# EAGLE board AMR3350 (EAGLE 9.3.0), part 1 of 2
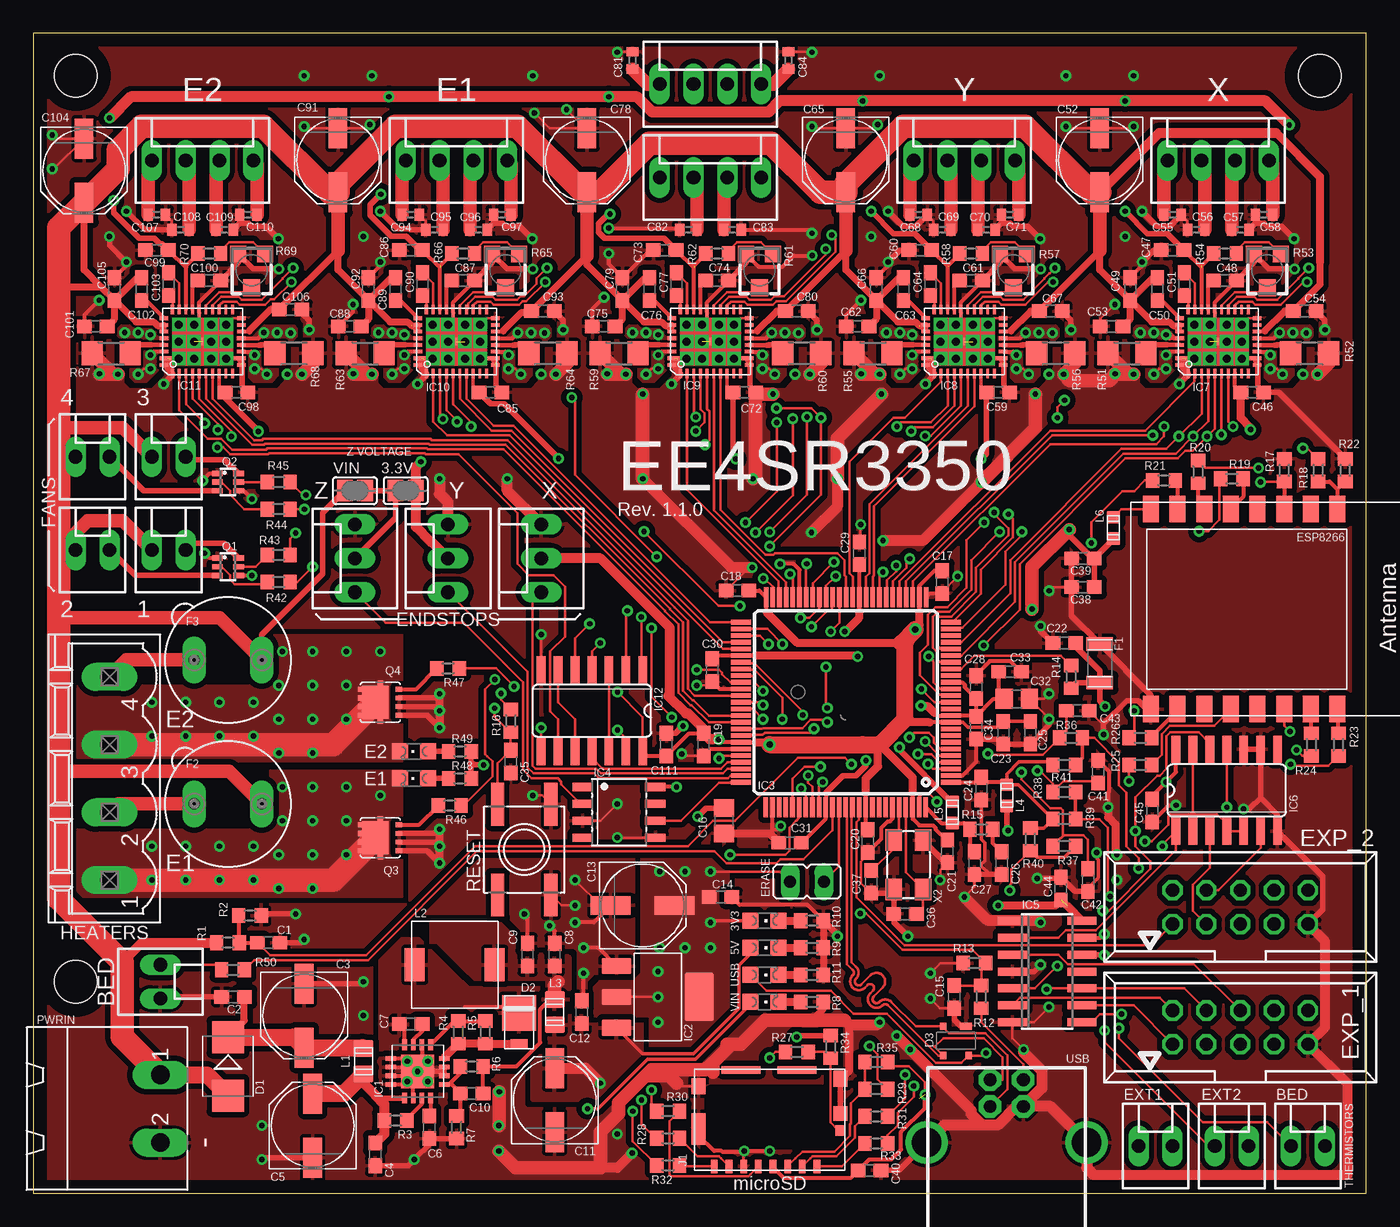
[diagram p0: board, top side]
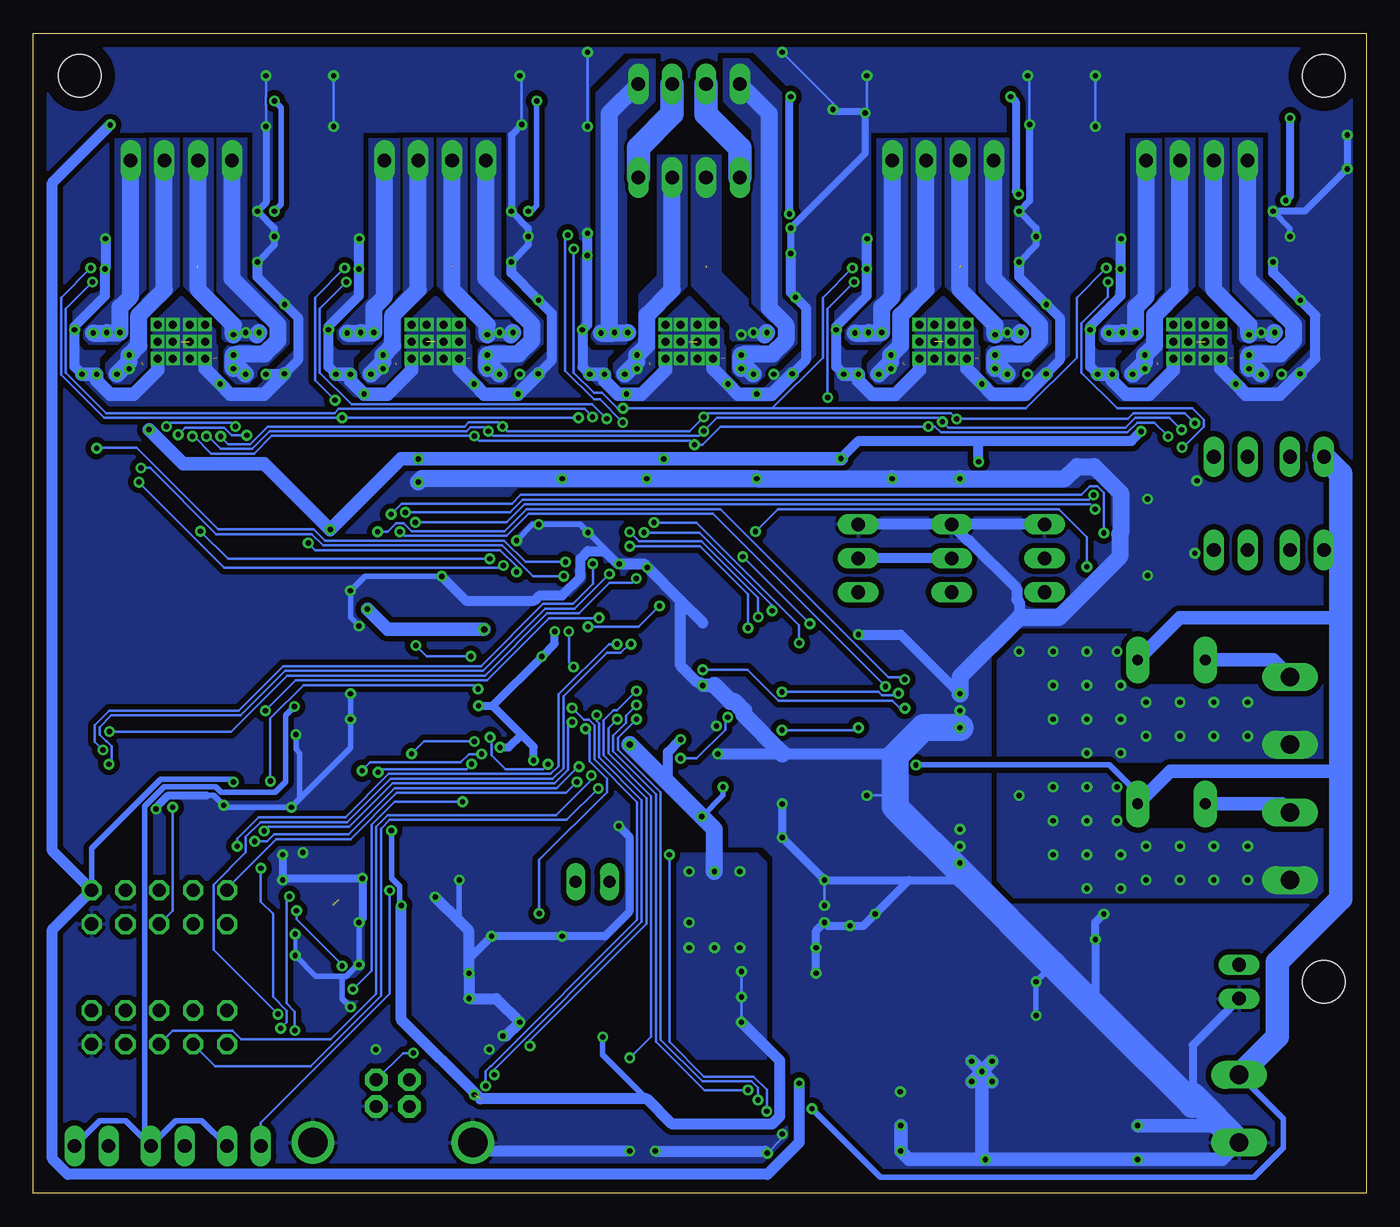
[diagram p1: board, bottom side, seen from below]

Size 100 x 87 mm. Coordinates in mm from the lower left corner, seen from the top.
Outline: 0,0 100,0 100,87 0,87 0,0
Copper layers (1*16): Top 0.035mm / dielectric 1.5mm / Bottom 0.035mm
Design rules "default *": minimum track width 6mil, minimum drill 0.4mm, track to track 6mil, track to pad 6mil, pad to pad 8mil, via to via 10mil, smd to smd 6mil, copper to edge 40mil, drill to drill 6mil, minimum pad ring 10mil, minimum via ring 8mil, stop-mask expansion 4mil, vias tented up to drill 16mil, thermal gap 10mil
Net classes: 3 usbvcc: width 0.102 mm, drill 0.1 mm, clearance 0.15 mm; 4 diff: width 0.203 mm
Holes 3.2 mm at 3.17,83.82 3.17,15.88 96.52,83.82
tKeepout: area 0.2,80.8 to 6.2,86.8; area 0.2,12.9 to 6.2,18.9; area 93.5,80.8 to 99.5,86.8

## Footprints (pad centres in the part's own frame; a part is rotated, then mirrored left to right if it is on the bottom)
CHIPLED_0805 = smd 1.2 x 1.2: A 0,-1.05; C 0,1.05
MOLEX-KK-254-2 = drill 1.02 long: 1 -1.27,0; 2 1.27,0
C0603 = smd 1.1 x 1: 1 -0.85,0; 2 0.85,0
PANASONIC_D = smd 3 x 1.4: + 2.4,0; - -2.4,0
C0805 = smd 1.3 x 1.5: 1 -0.95,0; 2 0.95,0
C0402 = smd 0.7 x 0.9: 1 -0.65,0; 2 0.65,0
SMB = smd 2.4 x 2.4: A 2.2,0; C -2.2,0
DO220AAL = smd 2.667 x 2.54: P$1 -0.7,0 | smd 0.762 x 1.27: P$2 1.65,0
SOT143B = smd 0.88 x 0.55: 1 -0.75,-1.1 | smd 0.48 x 0.55: 2 0.95,-1.1; 3 0.95,1.1; 4 -0.95,1.1
JP1 = drill 0.914 long: 1 0,-1.27; 2 0,1.27
ESP-12 = smd 2 x 1.2: 1 -7.5,4.5; 2 -7.5,2.5; 3 -7.5,0.5; 4 -7.5,-1.5; 5 -7.5,-3.5; 6 -7.5,-5.5; 7 -7.5,-7.5; 8 -7.5,-9.5; 9 7.5,-9.5; 10 7.5,-7.5; 11 7.5,-5.5; 12 7.5,-3.5; 13 7.5,-1.5; 14 7.5,0.5; 15 7.5,2.5; 16 7.5,4.5
057-010-1 = drill 1 octagon: 1 -5.08,-1.27; 2 -5.08,1.27; 3 -2.54,-1.27; 4 -2.54,1.27; 5 0,-1.27; 6 0,1.27; 7 2.54,-1.27; 8 2.54,1.27; 9 5.08,-1.27; 10 5.08,1.27
MC36207 = smd 1 x 2: 1 -1.45,0; 2 1.45,0
19560 = drill 0.813 pad 1.778 long: 1 -2.54,0; 2 2.54,0
QFN16-4X4 = smd 0.8 x 0.35: 1 -2,0.975; 2 -2,0.325; 3 -2,-0.325; 4 -2,-0.975; 9 2,-0.975; 10 2,-0.325; 11 2,0.325; 12 2,0.975 | smd 0.35 x 0.8: 5 -0.975,-2; 6 -0.325,-2; 7 0.325,-2; 8 0.975,-2; 13 0.975,2; 14 0.325,2; 15 -0.325,2; 16 -0.975,2 | smd 2.5 x 2.5: EXP 0,0
SOT223 = smd 2.235 x 1.219: 1 -3.099,2.311; 2 -3.099,0; 3 -3.099,-2.311 | smd 2.2 x 3.6: 4 3.099,0
LQFP100 = smd 1.5 x 0.35: 1 -7.875,6; 2 -7.875,5.5; 3 -7.875,5; 4 -7.875,4.5; 5 -7.875,4; 6 -7.875,3.5; 7 -7.875,3; 8 -7.875,2.5; 9 -7.875,2; 10 -7.875,1.5; 11 -7.875,1; 12 -7.875,0.5; 13 -7.875,0; 14 -7.875,-0.5; 15 -7.875,-1; 16 -7.875,-1.5; 17 -7.875,-2; 18 -7.875,-2.5; 19 -7.875,-3; 20 -7.875,-3.5; 21 -7.875,-4; 22 -7.875,-4.5; 23 -7.875,-5; 24 -7.875,-5.5; 25 -7.875,-6; 51 7.875,-6; 52 7.875,-5.5; 53 7.875,-5; 54 7.875,-4.5; 55 7.875,-4; 56 7.875,-3.5; 57 7.875,-3; 58 7.875,-2.5; 59 7.875,-2; 60 7.875,-1.5; 61 7.875,-1; 62 7.875,-0.5; 63 7.875,0; 64 7.875,0.5; 65 7.875,1; 66 7.875,1.5; 67 7.875,2; 68 7.875,2.5; 69 7.875,3; 70 7.875,3.5; 71 7.875,4; 72 7.875,4.5; 73 7.875,5; 74 7.875,5.5; 75 7.875,6 | smd 0.35 x 1.5: 26 -6.025,-7.875; 27 -5.525,-7.875; 28 -5.025,-7.875; 29 -4.525,-7.875; 30 -4.025,-7.875; 31 -3.525,-7.875; 32 -3.025,-7.875; 33 -2.525,-7.875; 34 -2.025,-7.875; 35 -1.525,-7.875; 36 -1.025,-7.875; 37 -0.525,-7.875; 38 -0.025,-7.875; 39 0.475,-7.875; 40 0.975,-7.875; 41 1.475,-7.875; 42 1.975,-7.875; 43 2.475,-7.875; 44 2.975,-7.875; 45 3.475,-7.875; 46 3.975,-7.875; 47 4.475,-7.875; 48 4.975,-7.875; 49 5.475,-7.875; 50 5.975,-7.875; 76 6,7.875; 77 5.5,7.875; 78 5,7.875; 79 4.5,7.875; 80 4,7.875; 81 3.5,7.875; 82 3,7.875; 83 2.5,7.875; 84 2,7.875; 85 1.5,7.875; 86 1,7.875; 87 0.5,7.875; 88 0,7.875; 89 -0.5,7.875; 90 -1,7.875; 91 -1.5,7.875; 92 -2,7.875; 93 -2.5,7.875; 94 -3,7.875; 95 -3.5,7.875; 96 -4,7.875; 97 -4.5,7.875; 98 -5,7.875; 99 -5.5,7.875; 100 -6,7.875
SOIC08-FAIRCHILD = smd 0.61 x 1.52: 1 -1.905,-2.723; 2 -0.635,-2.723; 3 0.635,-2.723; 4 1.905,-2.723; 5 1.905,2.723; 6 0.635,2.723; 7 -0.635,2.723; 8 -1.905,2.723
SO14 = smd 0.6 x 2.2: 1 -3.81,-2.6; 2 -2.54,-2.6; 3 -1.27,-2.6; 4 0,-2.6; 5 1.27,-2.6; 6 2.54,-2.6; 7 3.81,-2.6; 8 3.81,2.6; 9 2.54,2.6; 10 1.27,2.6; 11 0,2.6; 12 -1.27,2.6; 13 -2.54,2.6; 14 -3.81,2.6
SO14' = smd 0.66 x 2.032: 1 -3.81,-3.073; 2 -2.54,-3.073; 3 -1.27,-3.073; 4 0,-3.073; 5 1.27,-3.073; 6 2.54,-3.073; 7 3.81,-3.073; 8 3.81,3.073; 9 2.54,3.073; 10 1.27,3.073; 11 0,3.073; 12 -1.27,3.073; 13 -2.54,3.073; 14 -3.81,3.073
QFN36-PAD = smd 0.7 x 0.26: 1 -2.4,2.25; 2 -2.4,1.75; 3 -2.4,1.25; 4 -2.4,0.75; 5 -2.4,0.25; 6 -2.4,-0.25; 7 -2.4,-0.75; 8 -2.4,-1.25; 9 -2.4,-1.75; 10 -2.4,-2.25; 19 2.4,-2.25; 20 2.4,-1.75; 21 2.4,-1.25; 22 2.4,-0.75; 23 2.4,-0.25; 25 2.4,0.75; 26 2.4,1.25; 27 2.4,1.75; 28 2.4,2.25 | smd 0.26 x 0.7: 11 -1.75,-2.9; 13 -0.75,-2.9; 14 -0.25,-2.9; 15 0.25,-2.9; 16 0.75,-2.9; 17 1.25,-2.9; 18 1.75,-2.9; 29 1.75,2.9; 30 1.25,2.9; 31 0.75,2.9; 32 0.25,2.9; 33 -0.25,2.9; 34 -0.75,2.9; 36 -1.75,2.9 | smd 0.26 x 1.2: 12 -1.25,-2.65; 35 -1.25,2.65 | smd 1.2 x 0.26: 24 2.15,0.25 | smd 0.6 x 0.6: TP 0,0
MOLEX-105162 = smd 1.05 x 1.08: G1 5.325,4.45 | smd 1.05 x 1.2: G2 5.325,7.06; G3 -5.325,6.49 | smd 1.05 x 2.39: G4 -5.325,3.305 | smd 0.5 x 1: P1 3.55,0.5; P2 2.45,0.5; P3 1.35,0.5; P4 0.25,0.5; P5 -0.85,0.5; P6 -1.95,0.5; P7 -3.05,0.5; P8 -4.15,0.5 | smd 0.72 x 0.78: P9 5.31,3.18 | smd 2.91 x 0.55: X1 -2.145,7.735; X2 2.045,7.735
MSTBV4 = drill 1.397 long: 1 -7.62,0; 2 -2.54,0; 3 2.54,0; 4 7.62,0
C0805' = smd 1.5 x 1.25: 1 0,0.95; 2 0,-0.95
SRR0604 = smd 1.5 x 2.5: P$1 3,0; P$2 -3,0
C0603' = smd 1 x 0.95: 1 0,0.8; 2 0,-0.8
MSTBA2 = drill 1.397 long: 1 -2.54,5.08; 2 2.54,5.08
SOT363_PHILIPS = smd 0.4 x 0.8: 1 -0.65,-0.8; 2 0,-0.8; 3 0.65,-0.8; 4 0.65,0.8; 5 0,0.8; 6 -0.65,0.8
3X3DFN-EP = smd 0.35 x 0.5: 1 -0.975,-1.4; 2 -0.325,-1.4; 3 0.325,-1.4; 4 0.975,-1.4 | smd 0.4 x 0.3: 5 0.975,1.5; 6 0.325,1.5; 7 -0.325,1.5; 8 -0.975,1.5 | smd 0.38 x 0.43: E1 -1.415,0; E2 1.415,0 | smd 2.45 x 1.98: PAD 0,0.36
R0603 = smd 1 x 1.1: 1 -0.85,0; 2 0.85,0
R1206 = smd 1.6 x 1.803: 1 -1.422,0; 2 1.422,0
RTRIM3103 = smd 1.2 x 1.25: 1 -1,-1.225; 3 1,-1.225 | smd 1.3 x 1.3: 2 0,1.3
EVQQ2 = smd 3.2 x 1: A -3.4,2; A' 3.4,2; B -3.4,-2; B' 3.4,-2
SJ = smd 1.168 x 1.6: 1 -0.762,0; 2 0.762,0
PN61729 = drill 0.95 pad 1.676 octagon: 1 1.25,4.71; 2 -1.25,4.71; 3 -1.25,2.71; 4 1.25,2.71 | drill 2.2: P$1 -6,0; P$2 6,0
5.0X3.2_KX-9A = smd 1.6 x 1.25: 1 -1.85,-1.1; 2 1.85,-1.1; 3 1.85,1.1; 4 -1.85,1.1
MOLEX-KK-254-4 = drill 1.02 long: 1 -3.81,0; 2 -1.27,0; 3 1.27,0; 4 3.81,0
MOLEX-KK-254-3 = drill 1.02 long: 1 -2.54,0; 2 0,0; 3 2.54,0

## Placement (x,y rotation side)
3V3  [CHIPLED_0805]  54.86,20.45 270 top
5V  [CHIPLED_0805]  54.86,18.41 270 top
BED  KK-254-2  [MOLEX-KK-254-2]  95.63,3.56 0 top
C1  10n  [C0603]  17.65,18.8 0 top
C2  10u  [C0603]  14.99,14.73 180 top
C3  100u  [PANASONIC_D]  20.32,13.34 270 top
C4  10u  [C0603]  25.65,2.92 270 top
C5  100u  [PANASONIC_D]  20.95,5.08 90 top
C6  100n  [C0603]  29.72,4.95 270 top
C7  22n  [C0603]  28.32,12.7 180 top
C8  10u  [C0603]  39.12,17.91 90 top
C9  10u  [C0603]  37.08,17.91 90 top
C10  10n  [C0603]  32.89,7.49 180 top
C11  220u  [PANASONIC_D]  39.12,6.99 90 top
C12  10u  [C0603]  41.15,13.59 90 top
C13  10u  [PANASONIC_D]  45.72,21.59 0 top
C14  10u  [C0603]  51.56,22.23 0 top
C15  100n  [C0603]  69.09,14.73 90 top
C16  10u  [C0805]  51.82,27.94 90 top
C17  100n  [C0603]  68.2,45.85 90 top
C18  100n  [C0603]  52.83,45.21 0 top
C19  100n  [C0603]  50.29,33.66 90 top
C20  100n  [C0603]  62.61,26.42 90 top
C21  100n  [C0603]  68.58,25.65 90 top
C22  2.2u  [C0603]  77.34,41.27 180 top
C23  100n  [C0603]  72.77,34.54 270 top
C24  100n  [C0603]  71.12,30.35 270 top
C25  10u  [C0603]  74.8,34.54 270 top
C26  4u7  [C0603]  72.64,24.77 270 top
C27  100n  [C0603]  70.61,24.77 270 top
C28  100n  [C0603]  70.74,37.97 90 top
C29  100n  [C0603]  61.98,48.01 90 top
C30  100n  [C0603]  50.93,39.24 270 top
C31  100n  [C0603]  56.77,26.29 180 top
C32  10u  [C0805]  73.79,37.08 0 top
C33  100n  [C0603]  73.28,39.12 0 top
C34  2.2u 0.1-10ohm ESR  [C0603]  70.74,34.92 270 top
C35  10n  [C0603]  35.81,32.38 270 top
C36  10p  [C0603]  65.41,20.95 180 top
C37  10p  [C0603]  62.87,23.37 270 top
C38  10u  [C0603]  78.74,45.47 180 top
C39  10u  [C0603]  78.74,47.62 180 top
C40  2.2u  [C0603]  62.74,1.71 0 top
C41  2.2u  [C0603]  79.88,31.62 90 top
C42  2.2u  [C0603]  79.12,23.5 270 top
C43  2.2u  [C0603]  78.36,36.2 0 top
C44  2.2u  [C0603]  77.09,22.86 90 top
C45  100n  [C0603]  83.95,28.7 270 top
C46  100n  [C0603]  91.44,60.07 0 top
C47  470n  [C0603]  85.47,70.74 180 top
C48  4u7  [C0603]  89.41,68.45 0 top
C49  100n  [C0603]  82.3,67.82 270 top
C50  100n  [C0603]  84.33,67.82 270 top
C51  22n  [C0603]  86.36,68.2 90 top
C52  100u  [PANASONIC_D]  80.01,77.47 270 top
C53  100n  [C0603]  80.9,65.02 180 top
C54  100n  [C0603]  95.38,66.17 0 top
C55  470p  [C0402]  85.47,73.41 0 top
C56  470p  [C0402]  87.25,72.26 180 top
C57  470p  [C0402]  90.55,72.26 0 top
C58  470p  [C0402]  92.33,73.41 180 top
C59  100n  [C0603]  72.39,60.07 0 top
C60  470n  [C0603]  66.55,70.74 180 top
C61  4u7  [C0603]  70.36,68.45 0 top
C62  100n  [C0603]  61.85,65.02 0 top
C63  100n  [C0603]  65.28,67.82 270 top
C64  22n  [C0603]  67.31,68.2 90 top
C65  100u  [PANASONIC_D]  60.96,77.47 270 top
C66  100n  [C0603]  63.25,67.82 90 top
C67  100n  [C0603]  76.33,66.17 0 top
C68  470p  [C0402]  66.42,73.41 0 top
C69  470p  [C0402]  68.2,72.26 180 top
C70  470p  [C0402]  71.5,72.26 0 top
C71  470p  [C0402]  73.28,73.41 180 top
C72  100n  [C0603]  53.34,60.07 0 top
C73  470n  [C0603]  47.37,70.74 180 top
C74  4u7  [C0603]  51.31,68.45 0 top
C75  100n  [C0603]  42.8,65.02 0 top
C76  100n  [C0603]  46.23,67.82 270 top
C77  22n  [C0603]  48.26,68.2 90 top
C78  100u  [PANASONIC_D]  41.53,77.47 270 top
C79  100n  [C0603]  44.2,67.82 90 top
C80  100n  [C0603]  57.28,66.17 0 top
C81  470p  [C0402]  44.96,84.96 90 top
C82  470p  [C0402]  49.15,72.26 180 top
C83  470p  [C0402]  52.45,72.26 0 top
C84  470p  [C0402]  56.64,84.96 90 top
C85  100n  [C0603]  34.29,60.07 0 top
C86  470n  [C0603]  28.32,70.74 180 top
C87  4u7  [C0603]  32.26,68.45 0 top
C88  100n  [C0603]  23.75,65.02 0 top
C89  100n  [C0603]  27.18,67.82 270 top
C90  22n  [C0603]  29.21,68.2 90 top
C91  100u  [PANASONIC_D]  22.86,77.47 270 top
C92  100n  [C0603]  25.15,67.82 90 top
C93  100n  [C0603]  38.23,66.17 0 top
C94  470p  [C0402]  28.32,73.41 0 top
C95  470p  [C0402]  30.1,72.26 180 top
C96  470p  [C0402]  33.4,72.26 0 top
C97  470p  [C0402]  35.18,73.41 180 top
C98  100n  [C0603]  15.24,60.07 0 top
C99  470n  [C0603]  9.27,70.74 180 top
C100  4u7  [C0603]  13.21,68.45 0 top
C101  100n  [C0603]  4.7,65.02 0 top
C102  100n  [C0603]  8.13,67.82 270 top
C103  22n  [C0603]  10.16,68.2 90 top
C104  100u  [PANASONIC_D]  3.81,76.71 270 top
C105  100n  [C0603]  6.1,67.82 90 top
C106  100n  [C0603]  19.3,66.29 0 top
C107  470p  [C0402]  9.27,73.41 0 top
C108  470p  [C0402]  11.05,72.26 180 top
C109  470p  [C0402]  14.35,72.26 0 top
C110  470p  [C0402]  16.13,73.41 180 top
C111  100n  [C0603]  47.5,33.66 90 top
D1  [SMB]  14.61,9.53 270 top
D2  SS1P3L  [DO220AAL]  36.45,12.83 270 top
D3  PRTR5V0U2XB  [SOT143B]  69.22,11.43 180 top
ERASE  [JP1]  58.04,23.37 270 top
ESP8266  [ESP-12]  93.34,43.81 270 top
EXP_1  057-010-1  [057-010-1]  90.55,12.45 0 top
EXP_2  057-010-1  [057-010-1]  90.55,21.46 0 top
EXT1  KK-254-2  [MOLEX-KK-254-2]  84.2,3.56 0 top
EXT1_L  [CHIPLED_0805]  28.57,31.11 90 top
EXT2  KK-254-2  [MOLEX-KK-254-2]  89.92,3.56 0 top
EXT2_L  [CHIPLED_0805]  28.57,33.15 90 top
F1  MC36207  [MC36207]  80.01,39.75 90 top
F2  [19560]  14.61,29.21 180 top
F3  [19560]  14.61,40.01 180 top
FAN1  KK-254-2  [MOLEX-KK-254-2]  10.16,48.26 0 top
FAN2  KK-254-2  [MOLEX-KK-254-2]  4.45,48.26 0 top
FAN3  KK-254-2  [MOLEX-KK-254-2]  10.16,55.24 0 top
FAN4  KK-254-2  [MOLEX-KK-254-2]  4.45,55.24 0 top
IC1  A4403  [QFN16-4X4]  28.83,9.14 90 top
IC2  LDO-TS1117CW-3V3  [SOT223]  46.86,14.73 0 top
IC3  ATSAM4S8C  [LQFP100]  60.96,36.83 180 top
IC4  SI87XXIS  [SOIC08-FAIRCHILD]  43.94,28.57 270 top
IC5  74HC125  [SO14]  76.07,16.64 270 top
IC6  74S08D  [SO14']  89.53,30.23 0 top
IC7  TMC21X0-LA  [QFN36-PAD]  88.9,63.88 90 top
IC8  TMC21X0-LA  [QFN36-PAD]  69.85,63.88 90 top
IC9  TMC21X0-LA  [QFN36-PAD]  50.8,63.88 90 top
IC10  TMC21X0-LA  [QFN36-PAD]  31.75,63.88 90 top
IC11  TMC21X0-LA  [QFN36-PAD]  12.7,63.88 90 top
IC12  74LS32D  [SO14']  41.91,36.2 180 top
J1  MOLEX-105162-001  [MOLEX-105162]  55.24,1.52 0 top
J2  MSTBV4  [MSTBV4]  5.71,31.11 90 top
L1  MH2029-300Y  [C0805']  24.77,9.91 0 top
L2  10uH  [SRR0604]  31.62,17.14 180 top
L3  MPZ2012S221A  [C0805']  39.12,13.59 0 top
L4  10uH 100MHz  [C0603']  73.03,29.84 0 top
L5  10uH 100MHz  [C0603']  68.96,28.57 180 top
L6  4n7H  [C0603']  81.03,49.91 180 top
PWRIN  MSTBA2  [MSTBA2]  4.45,6.35 270 top
Q1  NX138BKS  [SOT363_PHILIPS]  14.61,46.99 270 top
Q2  NX138BKS  [SOT363_PHILIPS]  14.61,53.34 270 top
Q3  AON7524  [3X3DFN-EP]  26.04,26.67 90 top
Q4  AON7524  [3X3DFN-EP]  26.04,36.83 90 top
R1  47K  [R0603]  14.61,18.8 180 top
R2  4.7K  [R0603]  16.26,20.83 180 top
R3  100K  [R0603]  27.18,5.46 180 top
R4  0R1  [R0603]  31.88,12.06 270 top
R5  0R1  [R0603]  33.91,12.06 270 top
R6  3K92  [R0603]  32.89,9.53 0 top
R7  750R  [R0603]  31.75,4.95 90 top
R8  4K7  [R0603]  58.42,14.35 0 top
R9  2K2  [R0603]  58.42,18.41 0 top
R10  180R  [R0603]  58.42,20.45 0 top
R11  2K2  [R0603]  58.42,16.38 0 top
R12  27K  [R0603]  71.12,14.73 90 top
R13  47K  [R0603]  70.61,17.27 180 top
R14  10K  [R0603]  77.85,38.73 270 top
R15  1R  [R0603]  71.12,27.3 180 top
R16  10K  [R0603]  35.81,35.43 90 top
R17  4K7  [R0603]  93.85,54.23 90 top
R18  470R  [R0603]  96.39,54.23 270 top
R19  47R  [R0603]  89.92,53.59 180 top
R20  47R  [R0603]  87.38,54.1 90 top
R21  47R  [R0603]  84.84,53.47 180 top
R22  2K2  [R0603]  98.42,54.23 270 top
R23  2K2  [R0603]  97.92,33.66 90 top
R24  470R  [R0603]  95.89,33.66 90 top
R25  2K2  [R0603]  83.06,32.13 0 top
R26  2K2  [R0603]  83.06,34.16 0 top
R27  220R  [R0603]  57.28,10.6 0 top
R28  220R  [R0603]  47.62,4.13 0 top
R29  220R  [R0603]  63.25,7.81 180 top
R30  100R  [R0603]  47.62,6.16 0 top
R31  220R  [R0603]  63.25,5.78 180 top
R32  220R  [R0603]  47.62,2.1 0 top
R33  220R  [R0603]  63.25,3.75 180 top
R34  10K  [R0603]  59.82,10.99 90 top
R35  10K  [R0603]  63.25,9.84 0 top
R36  10K  [R0603]  77.85,34.16 0 top
R37  10K  [R0603]  77.34,26.04 0 top
R38  10K  [R0603]  77.34,30.1 0 top
R39  4K7 0.1%  [R0603]  77.34,28.07 180 top
R40  4K7 0.1%  [R0603]  74.8,26.54 90 top
R41  4K7 0.1%  [R0603]  77.34,32.13 180 top
R42  1K  [R0603]  18.41,45.85 180 top
R43  1K  [R0603]  18.41,47.88 180 top
R44  1K  [R0603]  18.41,51.31 180 top
R45  1K  [R0603]  18.41,53.34 180 top
R46  180R  [R0603]  31.24,29.08 180 top
R47  180R  [R0603]  31.11,39.37 180 top
R48  4K7  [R0603]  32,31.11 0 top
R49  4K7  [R0603]  32,33.15 0 top
R50  180R  [R0603]  14.99,16.76 180 top
R51  0R11  [R1206]  82.04,62.99 180 top
R52  0R11  [R1206]  95.76,62.99 0 top
R53  20K  [RTRIM3103]  92.58,69.22 180 top
R54  20K  [R0603]  89.41,70.48 180 top
R55  0R11  [R1206]  62.99,62.99 180 top
R56  0R11  [R1206]  76.71,62.99 0 top
R57  20K  [RTRIM3103]  73.53,69.22 180 top
R58  20K  [R0603]  70.36,70.48 180 top
R59  0R11  [R1206]  43.94,62.99 180 top
R60  0R11  [R1206]  57.66,62.99 0 top
R61  20K  [RTRIM3103]  54.48,69.22 180 top
R62  20K  [R0603]  51.31,70.48 180 top
R63  0R11  [R1206]  24.89,62.99 180 top
R64  0R11  [R1206]  38.61,62.99 0 top
R65  20K  [RTRIM3103]  35.43,69.22 180 top
R66  20K  [R0603]  32.26,70.48 180 top
R67  0R11  [R1206]  5.84,62.99 180 top
R68  0R11  [R1206]  19.56,62.99 0 top
R69  20K  [RTRIM3103]  16.38,69.22 180 top
R70  20K  [R0603]  13.21,70.48 180 top
RESET  [EVQQ2]  36.83,25.78 90 top
SJ1  [SJ]  27.94,52.7 180 top
SJ2  [SJ]  24.13,52.7 0 top
USB  USB-B_TH  [PN61729]  73.03,3.81 0 top
USB_L  [CHIPLED_0805]  54.86,16.38 270 top
VIN  [CHIPLED_0805]  54.86,14.35 270 top
X2  12MHz  [5.0X3.2_KX-9A]  65.66,24.64 270 top
X3  KK-254-2  [MOLEX-KK-254-2]  9.53,15.88 270 top
X4  KK-254-4  [MOLEX-KK-254-4]  88.9,77.47 0 top
X5  KK-254-4  [MOLEX-KK-254-4]  69.85,77.47 0 top
X6  KK-254-4  [MOLEX-KK-254-4]  50.8,76.2 0 top
X7  KK-254-4  [MOLEX-KK-254-4]  50.8,83.19 0 top
X8  KK-254-4  [MOLEX-KK-254-4]  31.75,77.47 0 top
X9  KK-254-4  [MOLEX-KK-254-4]  12.7,77.47 0 top
X_STOP  KK-254-3  [MOLEX-KK-254-3]  38.1,47.62 90 top
Y_STOP  KK-254-3  [MOLEX-KK-254-3]  31.11,47.62 90 top
Z_STOP  KK-254-3  [MOLEX-KK-254-3]  24.13,47.62 90 top

## Library data of the parts
3V3 5V EXT1_L EXT2_L USB_L VIN = led
BED EXT1 EXT2 FAN1-FAN4 X3-X9 X_STOP Y_STOP Z_STOP = con-other
C1-C110 R1-R70 = resistor
C111 = rcl; SPICEPREFIX: C
D1 = diode
D2 = Diodi; CASE: SMP; MONTHLY_USAGE: _____; PART_NUMBER: SS1P3L-M3/84A; PRICE: _____; SUPPLIER: _____; TYPE: Diodi
D3 L1 L3 = Arduino
ERASE SJ1 SJ2 = jumper
ESP8266 = adafruit
EXP_1 EXP_2 = con-panduit; OC_FARNELL: unknown; OC_NEWARK: unknown
F1 IC1 IC3-IC5 J1 Q1-Q4 RESET X2 = misc
F2 F3 = fuse; MPN: 56000001009; OC_FARNELL: 1185363; OC_NEWARK: 15P8392
IC2 = we-power
IC6 IC12 = 74xx-us
IC7-IC11 = SilentStepStick-TMC2130_v11
J2 = con-phoenix-508; MPN: MSTBV 2,5/4-GF-5.08; OC_FARNELL: 1792794; OC_NEWARK: 69R9847
L2 = Arduino-DUE-V03
L4-L6 = Zero_V1.0
PWRIN = con-phoenix-508; MF: FARNELL; MPN: 1757242; OC_FARNELL: 3705171; OC_NEWARK: 71C4161
USB = SmartPrj

## Nets
3V3_LED: 3V3.C R10.1
5V_E1: C87.1 IC10.25
5V_E2: C100.1 IC11.25
5V_LED: 5V.C R9.1
5V_X: C48.1 IC7.25
5V_Y: C61.1 IC8.25
5V_Z: C74.1 IC9.25
24V_LED: R8.1 VIN.C
+3V3: 3V3.A C13.+ C14.1 C16.2 C17.2 C18.2 C19.2 C20.2 C21.2 C23.1 C25.1 C38.1 C39.1 C40.1 C44.1 C46.1 C59.1 C72.1 C85.1 C98.1 C111.1 ERASE.1 IC2.2 IC2.4 IC3.10 IC3.27 IC3.50 IC3.69 IC3.91 IC3.98 IC4.8 IC5.14 IC7.8 IC8.8 IC9.8 IC10.8 IC11.8 IC12.14 J1.P4 L4.2 L6.1 R16.2 R34.2 R35.2 SJ1.1 X_STOP.2 Y_STOP.2
+5V: 5V.A C11.+ C12.1 C45.1 C47.1 C60.1 C73.1 C86.1 C99.1 EXP_2.10 IC2.3 IC6.14 IC7.26 IC8.26 IC9.26 IC10.26 IC11.26 L3.2 R54.2 R58.2 R62.2 R66.2 R70.2
+12V: C49.2 C50.1 C52.+ C53.1 C54.1 C62.2 C63.1 C65.+ C66.1 C67.1 C75.2 C76.1 C78.+ C79.1 C80.1 C88.2 C89.1 C91.+ C92.1 C93.1 C101.2 C102.1 C104.+ C105.1 C106.1 D1.A F2.1 F3.1 FAN1.1 FAN2.1 FAN3.1 FAN4.1 IC7.16 IC7.30 IC7.31 IC8.16 IC8.30 IC8.31 IC9.16 IC9.30 IC9.31 IC10.16 IC10.30 IC10.31 IC11.16 IC11.30 IC11.31 PWRIN.1 R1.2 R48.2 R49.2 SJ2.1 VIN.A
A1_E1: C94.1 IC10.34 X8.1
A1_E2: C107.1 IC11.34 X9.1
A1_X: C55.1 IC7.34 X4.1
A1_Y: C68.1 IC8.34 X5.1
A1_Z: C81.1 IC9.34 X7.1
A2_E1: C95.1 IC10.32 X8.2
A2_E2: C108.1 IC11.32 X9.2
A2_X: C56.1 IC7.32 X4.2
A2_Y: C69.1 IC8.32 X5.2
A2_Z: C82.1 IC9.32 X6.2
ADVREF: C24.1 IC3.1 L4.1 R39.2 R40.2 R41.2
AMID_Z: X6.1 X7.2
B1_E1: C96.1 IC10.13 X8.3
B1_E2: C109.1 IC11.13 X9.3
B1_X: C57.1 IC7.13 X4.3
B1_Y: C70.1 IC8.13 X5.3
B1_Z: C83.1 IC9.13 X6.3
B2_E1: C97.1 IC10.15 X8.4
B2_E2: C110.1 IC11.15 X9.4
B2_X: C58.1 IC7.15 X4.4
B2_Y: C71.1 IC8.15 X5.4
B2_Z: C84.1 IC9.15 X7.4
BED: IC3.86 R50.1
BED_L: EXT2_L.A R49.1
BED_OUT: R50.2 X3.1
BMID_Z: X6.4 X7.3
BOOT: C7.1 IC1.11
BRA_E1: IC10.33 R63.1
BRA_E2: IC11.33 R67.1
BRA_X: IC7.33 R51.1
BRA_Y: IC8.33 R55.1
BRA_Z: IC9.33 R59.1
BRB_E1: IC10.14 R64.1
BRB_E2: IC11.14 R68.1
BRB_X: IC7.14 R52.1
BRB_Y: IC8.14 R56.1
BRB_Z: IC9.14 R60.1
CLK: J1.P5 R30.2
CMD: J1.P3 R29.2 R35.1
CPI_E1: C90.1 IC10.28
CPI_E2: C103.1 IC11.28
CPI_X: C51.1 IC7.28
CPI_Y: C64.1 IC8.28
CPI_Z: C77.1 IC9.28
CPO_E1: C90.2 IC10.27
CPO_E2: C103.2 IC11.27
CPO_X: C51.2 IC7.27
CPO_Y: C64.2 IC8.27
CPO_Z: C77.2 IC9.27
DAT0: J1.P7 R28.2
DAT1: J1.P8 R32.2
DAT2: J1.P1 R33.2
DAT3: J1.P2 R31.2
DET: J1.P9 R27.2 R34.1
E1_DIR: IC3.51 IC10.7
E1_EN: IC3.55 IC10.2
E1_FUSED: F2.2 J2.2
E1_STEP: IC3.54 IC10.6
E2_DIR: IC3.62 IC11.7
E2_EN: IC3.66 IC11.2
E2_FUSED: F3.2 J2.4
E2_STEP: IC3.65 IC11.6
EDR_CONN: ESP8266.12 R25.2
ENN: IC3.71 IC7.22 IC8.22 IC9.22 IC10.22 IC11.22
ERASE: ERASE.2 IC3.87
ESP_CS: ESP8266.10 R26.2
ESP_DATA_RDY: IC3.13 R25.1
ESP_EN: ESP8266.3 IC3.32 R17.1
ESP_MISO: IC3.41 R20.2
ESP_MOSI: IC3.33 R21.2
ESP_NPCS0: IC3.42 R26.1
ESP_RESET: IC3.43 R18.1
ESP_RST: ESP8266.1 R18.2 R22.2
ESP_RXD: ESP8266.16 R23.2
ESP_SCK: IC3.31 R19.2
ESP_TXD: ESP8266.15 R24.2
ESP_URXD: IC3.46 R23.1
ESP_UTXD: IC3.44 R24.1
ESP_VIN: ESP8266.8 L6.2
EXT1: IC3.24 R46.1
EXT1_D: EXT1_L.C J2.1 Q3.5 Q3.6 Q3.7 Q3.8 Q3.E1 Q3.E2 Q3.PAD
EXT1_G: Q3.4 R46.2
EXT2: IC3.19 R47.1
EXT2_D: EXT2_L.C J2.3 Q4.5 Q4.6 Q4.7 Q4.8 Q4.E1 Q4.E2 Q4.PAD
EXT2_G: Q4.4 R47.2
EXT_L: EXT1_L.A R48.1
FAN1_D: FAN1.2 Q1.6
FAN1_G: Q1.2 R42.2
FAN2_D: FAN2.2 Q1.3
FAN2_G: Q1.5 R43.2
FAN3_D: FAN3.2 Q2.6
FAN3_G: Q2.2 R44.2
FAN4_D: FAN4.2 Q2.3
FAN4_G: Q2.5 R45.2
FAN_E1: IC3.40 R42.1
FAN_E2: IC3.25 R43.1
FAN_MOBO: IC3.14 R44.1
FAN_PART: IC3.21 R45.1
FB: C10.2 IC1.5 R6.1 R7.2
GND: C1.2 C2.2 C3.- C4.2 C5.- C6.2 C8.2 C9.2 C11.- C12.2 C13.- C14.2 C15.1 C16.1 C17.1 C18.1 C19.1 C20.1 C21.1 C22.2 C23.2 C24.2 C25.2 C26.2 C27.2 C28.2 C29.2 C30.2 C31.2 C32.2 C33.2 C34.2 C35.2 C36.2 C37.2 C38.2 C39.2 C40.2 C41.2 C42.2 C43.2 C44.2 C45.2 C46.2 C47.2 C48.2 C49.1 C52.- C53.2 C54.2 C55.2 C56.2 C57.2 C58.2 C59.2 C60.2 C61.2 C62.1 C65.- C66.2 C67.2 C68.2 C69.2 C70.2 C71.2 C72.2 C73.2 C74.2 C75.1 C78.- C79.2 C80.2 C81.2 C82.2 C83.2 C84.2 C85.2 C86.2 C87.2 C88.1 C91.- C92.2 C93.2 C94.2 C95.2 C96.2 C97.2 C98.2 C99.2 C100.2 C101.1 C104.- C105.2 C106.2 C107.2 C108.2 C109.2 C110.2 C111.2 D3.1 ESP8266.9 EXP_1.9 EXP_2.9 F1.2 IC1.2 IC1.6 IC1.7 IC1.10 IC1.13 IC1.14 IC1.15 IC1.16 IC1.EXP IC2.1 IC3.2 IC3.26 IC3.45 IC3.61 IC3.70 IC3.77 IC3.95 IC4.3 IC4.5 IC5.1 IC5.4 IC5.7 IC5.12 IC5.13 IC6.7 IC6.9 IC6.10 IC7.1 IC7.11 IC7.12 IC7.18 IC7.24 IC7.35 IC7.36 IC7.TP IC8.1 IC8.11 IC8.12 IC8.18 IC8.24 IC8.35 IC8.36 IC8.TP IC9.1 IC9.11 IC9.12 IC9.18 IC9.24 IC9.35 IC9.36 IC9.TP IC10.1 IC10.11 IC10.12 IC10.18 IC10.24 IC10.35 IC10.36 IC10.TP IC11.1 IC11.11 IC11.12 IC11.18 IC11.24 IC11.35 IC11.36 IC11.TP IC12.7 J1.G1 J1.G2 J1.G3 J1.G4 J1.P6 PWRIN.2 Q1.1 Q1.4 Q2.1 Q2.4 Q3.1 Q3.2 Q3.3 Q4.1 Q4.2 Q4.3 R2.1 R7.1 R8.2 R9.2 R10.2 R11.2 R13.2 R17.2 R22.1 R51.2 R52.2 R53.3 R55.2 R56.2 R57.3 R59.2 R60.2 R61.3 R63.2 R64.2 R65.3 R67.2 R68.2 R69.3 RESET.B RESET.B' USB.4 USB.P$1 USB.P$2 X2.2 X2.4 X3.2 X_STOP.3 Y_STOP.3 Z_STOP.3
IDEK: C26.1 R15.1
IREF_E1: IC10.23 R65.2
IREF_E2: IC11.23 R69.2
IREF_X: IC7.23 R53.2
IREF_Y: IC8.23 R57.2
IREF_Z: IC9.23 R61.2
ISEN: D2.P$2 IC1.8 R4.2 R5.2
LCD_BEEP: EXP_2.1 IC3.90
LCD_CS: IC3.80 IC6.2 IC6.4 IC6.5 IC6.13
LCD_CS_BUF: EXP_2.4 IC6.6
LCD_ENC_A: EXP_1.5 IC3.83
LCD_ENC_B: EXP_1.3 IC3.82
LCD_ENC_SW: EXP_2.2 IC3.84
LCD_MISO: IC3.53 IC5.8
LCD_MISO_BUF: EXP_1.1 IC5.9
LCD_MOSI: IC3.52 IC5.2 IC6.1
LCD_MOSI_BUF: EXP_2.3 IC6.3
LCD_SCK: IC3.67 IC5.5 IC6.12
LCD_SCK_BUF: EXP_2.5 IC6.11
LCD_SD_CS: EXP_1.4 IC3.99 IC5.10
LX: C7.2 D2.P$1 IC1.12 L2.P$1
MCCDA: IC3.59 R29.1
MCCK: IC3.63 R30.1
MCDA0: IC3.64 R28.1
MCDA1: IC3.81 R32.1
MCDA2: IC3.39 R33.1
MCDA3: IC3.57 R31.1
MISO: ESP8266.6 R20.1
MOSI: ESP8266.7 R21.1
MOT_MISO: IC3.15 IC7.5 IC8.5 IC9.5 IC10.5 IC11.5
MOT_MOSI: IC3.20 IC7.4 IC8.4 IC9.4 IC10.4 IC11.4
MOT_SCK: IC3.22 IC7.3 IC8.3 IC9.3 IC10.3 IC11.3
PWR_FAIL_DET2: C1.1 IC3.6 R1.1 R2.2
REFIN_E1: R65.1 R66.1
REFIN_E2: R69.1 R70.1
REFIN_X: R53.1 R54.1
REFIN_Y: R57.1 R58.1
REFIN_Z: R61.1 R62.1
RESET: C35.1 IC3.60 R16.1 RESET.A'
SAM_TFR_RDY: ESP8266.14 IC3.49
SD_CD: IC3.58 R27.1
SD_MOSI_BUF: EXP_1.6 IC5.3
SD_SCK_BUF: EXP_1.2 IC5.6
SG_TST: IC3.72 IC12.11
SG_TST_E1: IC10.21 IC12.5
SG_TST_E1Z: IC12.6 IC12.10
SG_TST_E2: IC11.21 IC12.9
SG_TST_X: IC7.21 IC12.1
SG_TST_XY: IC12.3 IC12.12
SG_TST_Y: IC8.21 IC12.2
SG_TST_Z: IC9.21 IC12.4
SG_TST_ZE: IC12.8 IC12.13
SGND: IC1.9 R4.1 R5.1
SPCK: ESP8266.5 R19.1
SS: C6.1 IC1.4
T_BED: C43.1 IC3.5 R36.1
T_BED_IN: BED.1 R36.2 R41.1
T_EXT1: C42.1 IC3.3 R37.1
T_EXT2: C41.1 IC3.4 R38.1
T_EXT_IN: EXT1.1 R37.2 R40.1
T_EXT_IN1: EXT2.1 R38.2 R39.1
TON: IC1.3 R3.1
USB_LED: R11.1 USB_L.C
USB_N [diff]: D3.3 IC3.88 USB.2
USB_P [diff]: D3.2 IC3.89 USB.3
USB_PWR_MON: C15.2 IC3.68 R12.2 R13.1
VBUS: D3.4 R12.1 USB.1 USB_L.A
VCP_E1: C89.2 IC10.29
VCP_E2: C102.2 IC11.29
VCP_X: C50.2 IC7.29
VCP_Y: C63.2 IC8.29
VCP_Z: C76.2 IC9.29
VDDOUT: C28.1 C29.1 C30.1 C31.1 C32.1 C33.1 C34.1 IC3.11 IC3.16 IC3.36 IC3.56 IC3.85 L5.2
VDDPLL: C27.1 IC3.100 L5.1 R15.2
VIN: C2.1 C3.+ D1.C L1.1
VIN_F: C4.1 C5.+ IC1.1 L1.2 R3.2
VOUT: C8.1 C9.1 C10.1 L2.P$2 L3.1 R6.2
VREF_MON: IC3.12
VSSA: BED.2 C22.1 EXT1.2 EXT2.2 F1.1 R14.2
VSSA_MON: IC3.18 R14.1
X_DIR: IC3.28 IC7.7
X_EN: IC3.30 IC7.2
X_STEP: IC3.29 IC7.6
X_STOP: IC3.73 X_STOP.1
XIN: C36.1 IC3.97 X2.3
XOUT: C37.1 IC3.96 X2.1
Y_DIR: IC3.34 IC8.7
Y_EN: IC3.37 IC8.2
Y_STEP: IC3.35 IC8.6
Y_STOP: IC3.74 Y_STOP.1
Z_DIR: IC3.38 IC9.7
Z_EN: IC3.48 IC9.2
Z_STEP: IC3.47 IC9.6
Z_STOP: IC3.75 IC4.6
Z_STOP_IN: IC4.2 Z_STOP.1
ZVSEL: SJ1.2 SJ2.2 Z_STOP.2

## Tracks (layer width: path | path; a pad name or v marks a point on that pad's centre or on a via)
3V3_LED
  Top 0.61: 3V3.C R10.1
5V_E1
  Top 0.305: IC10.25 31,68.05 C87.1
5V_E2
  Top 0.305: IC11.25 11.95,68.05 C100.1
5V_LED
  Top 0.61: 5V.C R9.1
5V_X
  Top 0.305: IC7.25 88.15,68.05 C48.1
5V_Y
  Top 0.305: IC8.25 69.1,68.05 C61.1
5V_Z
  Top 0.305: IC9.25 50.05,68.05 C74.1
24V_LED
  Top 0.61: VIN.C R8.1
+3V3  (via drill 0.4, 0.5)  (2 unrouted)
  Top 0.203: IC2.2 v46.86,14.73 | v50.8,24.13 56.01,24.13 ERASE.1 | R35.2 64.39,9.55 65.68,9.55 66.91,8.32 v66.91,7.39 | IC12.14 45.72,35.72 v43.84,37.61 | v35.1,37.5 35.1,37 R16.2
  Top 0.254: C59.1 71.52,60.09 71.1,60.51 IC8.8 | C72.1 52.05,60.51 IC9.8 | C85.1 33,60.51 IC10.8 | C98.1 13.95,60.51 IC11.8 | IC3.10 69.22,35.33 69.74,35.33 70.12,34.95 72.32,34.95 C23.1 C25.1 | v50.8,20.32 50.93,20.45 3V3.A
  Top 0.305: C17.2 67.62,46.7 66.48,45.56 IC3.27 66.48,43.63 | C18.2 54.48,45.21 IC3.50 54.98,43.63 55.02,43.59 | C20.2 62.46,27.42 IC3.91 62.46,30.03 | C21.2 68.49,26.5 67.69,27.3 67.69,27.41 67.51,27.59 66.47,27.59 65.98,28.08 65.98,28.93 IC3.98 65.96,30.03 | J1.P4 55.49,1.94 56.27,1.17 61.34,1.17 C40.1 62.71,2.54 64.37,2.54 65.11,3.28 65.11,4.6 66.91,6.39 v66.91,7.39 | 69.22,35.33 68.13,35.33 68.12,35.32 67.25,35.32 | 54.16,33.83 IC3.69 50.97,33.83 C19.2 49.2,34.51 C111.1 46.04,32.8 IC12.14 | C46.1 90.15,60.51 IC7.8 | v48.26,30.48 IC4.8
  Top 0.406: v39.4,55.12 35.3,59.22 34.3,59.22 C85.1 | v16.89,57.15 14.39,59.65 C98.1 | v52.7,55.09 52.49,55.3 C72.1 | v77.72,49.78 77.72,49.36 79.46,47.62 C39.1 | C39.1 C38.1 | C39.1 81.03,49.06 L6.1 | v73.13,27.2 73.03,27.3 L4.2 | v71.12,55.09 71.52,55.49 71.52,60.09 | v49.85,28.26 50.48,28.89 C16.2 | R34.2 57.38,11.84 v57.28,11.73
  Top 0.61: 65.41,35.56 65.64,35.32 67.25,35.32 | v66.17,42.29 66.48,42.61 66.48,43.63 | 65.41,41.27 65.15,41.27 57.34,41.27 55.02,43.59 | v55.24,33.66 55.07,33.83 54.16,33.83 | 63.5,33.66 65.96,31.2 65.96,30.03 | 62.46,33.42 62.23,33.66 | 62.46,30.03 62.46,31.11 63.37,32.03 63.37,33.66 | v72.39,21.59 76.67,21.59 C44.1 | 77.53,21.59 IC5.14 | C16.2 51.5,29.21 | C46.1 90.59,58.16 91.31,57.44 v91.31,57.28
  Top 0.762: v51.44,34.04 50.76,34.04 C19.2 50.29,34.83 49.13,35.99 48.95,35.99 47.62,37.32 47.77,37.46 47.77,42.41 42.55,47.62 X_STOP.2 | Y_STOP.2 29.87,48.87 29.81,48.87 28.7,49.98 SJ1.1 28.7,54.48 v29.08,54.86
  Top 1.016: v77.72,49.78 74.93,46.99 v74.93,43.81
  Top 1.27: 65.41,41.27 65.41,35.56 63.5,33.66 63.37,33.66 62.23,33.66 v55.24,33.66 | 65.15,41.27 v66.17,42.29
  Bottom 0.203: v46.86,16.64 v46.86,14.73 v46.86,12.83 | v43.84,37.61 36.59,37.61 36.35,37.36 35.23,37.36 v35.1,37.5
  Bottom 0.406: 39.37,55.09 v39.4,55.12 | v73.13,27.2 73.13,23.65 72.5,23.02 72.5,21.7 v72.39,21.59 | v48.26,30.48 48.26,29.84 v49.85,28.26 | v57.28,11.73 57.28,10.4 52.07,5.19
  Bottom 0.762: v39.4,55.12 38.09,56.43 29.21,56.43 | 29.21,56.43 17.61,56.43 v16.89,57.15 | 52.39,30.8 52.39,33.09 v51.44,34.04 | Y_STOP.2 X_STOP.2 | v29.08,54.86 29.08,56.3 29.21,56.43
  Bottom 0.813: v46.86,12.83 44.01,9.97 44.01,5.75 44.58,5.19 52.07,5.19 53.97,7.09 66.46,7.09 72.39,13.02 v72.39,21.59
  Bottom 1.016: v91.31,57.28 88.76,54.73 82.67,54.73 v77.72,49.78 72.42,55.09 v71.12,55.09 v52.7,55.09 39.37,55.09 | v74.93,43.81 73.41,42.29 v66.17,42.29
  Bottom 1.27: v55.24,33.66 52.39,30.8 v49.85,28.26 48.9,27.3 v48.9,24.13
  other vias: 50.8,18.41 46.99,24.13 48.9,18.41 46.99,18.41
  pour Top (isolate 0.406, no thermals): 41.91,13.34 41.91,15.24 42.55,15.88 45.09,15.88 45.72,16.51 45.72,25.4 52.07,25.4 52.07,11.43 50.8,10.16 46.35,10.16 46.35,13.34
  pour Bottom (isolate 0.406, no thermals): 45.72,25.4 52.07,25.4 52.07,10.16 45.09,10.16 45.09,24.77
+5V  (via drill 0.4)  (4 unrouted)
  Top 0.254: IC2.3 45.72,10.46 49.52,10.46 52.94,13.88 52.94,17.1 53.81,17.98 5V.A
  Top 0.305: IC7.26 87.65,69.41 C47.1 | 87.65,69.58 R54.2 | IC8.26 68.6,69.54 C60.1 | 68.6,69.58 R58.2 | IC9.26 49.55,69.41 C73.1 | 49.55,69.58 R62.2 | IC10.26 30.5,69.41 C86.1 | 30.5,69.58 R66.2 | IC11.26 11.45,69.41 | R70.2 11.45,69.58 11.45,69.41 | C99.1 11.45,69.41 | C45.1 83.95,29.81 v84.98,30.84 85.72,31.58 IC6.14
  Top 0.406: C99.1 9.63,71.23 9.48,71.23 9.08,71.63 7.94,71.63 6.03,73.54 v6.03,74.47 | C86.1 29.04,70.74 27.98,71.8 26.83,71.8 25.28,73.35 25.28,74.14 v26.07,74.93 | v43.27,73.45 43.17,73.45 42.42,72.7 42.42,72.08 42.87,71.63 47.33,71.63 C73.1 | C60.1 66.15,71.98 64.54,71.98 v62.87,73.66 | C47.1 85.08,71.98 83.59,71.98 v81.92,73.66
  Top 0.813: C11.+ 41.41,9.38 v42.55,8.26 | v94.23,80.14 92.44,81.93 v81.92,81.93 v62.23,81.93 55.99,81.93 55.16,81.1 46.44,81.1 45.3,82.24 v43.18,82.24 v26.67,82.24 7.31,82.24 v5.71,80.64
  Bottom 0.406: v62.23,81.93 62.23,74.06 62.63,73.66 v62.87,73.66 | v81.92,81.93 81.41,81.42 81.41,74.17 v81.92,73.66 | EXP_2.10 95.63,25.86 90.43,31.06 85.2,31.06 v84.98,30.84
  Bottom 0.61: v5.71,80.64 5.71,74.78 v6.03,74.47 | v26.67,82.24 26.29,81.86 26.29,75.15 v26.07,74.93 | v43.27,73.45 43.27,82.16 v43.18,82.24
  Bottom 0.813: v42.55,8.26 42.55,3.81 44.93,1.42 97.41,1.42 98.58,2.6 98.58,19.79 EXP_2.10 98.58,25.68 98.58,75.79 v94.23,80.14
  pour Top (isolate 0.406, rank 3): 38.1,13.34 46.35,13.34 46.35,8.89 44.45,6.99 37.47,6.99 37.47,13.34
+12V  (via drill 0.4)  (2 unrouted)
  Top 0.254: VIN.A 53.81,14.18 49.69,10.06 46.07,10.06 42.36,6.35 v41.58,6.35
  Top 0.305: IC7.30 IC7.31 85.56,65.07 85.52,65.07 | 92.4,64.69 92.34,64.63 IC7.16 | IC9.30 IC9.31 47.46,65.07 47.42,65.07 | 35.25,64.69 35.19,64.63 IC10.16 | IC11.30 IC11.31 9.36,65.07 9.32,65.07 | 16.2,64.69 16.14,64.63 IC11.16 | IC8.30 IC8.31 66.51,65.07 | 73.35,64.69 73.29,64.63 IC8.16 | 54.3,64.69 54.24,64.63 IC9.16 | IC10.30 IC10.31 28.41,65.07
  Top 0.406: R48.2 32.85,32.38 | 32.85,32.38 R49.2 | 32.85,32.38 33.11,32.13 v33.78,32.13 | F3.1 17.14,41.91 21.71,46.48 21.71,51.05 SJ2.1
  Top 0.508: C49.2 83.9,65.36 85.23,65.36 85.52,65.07 86,65.07 | C53.1 82.3,65.57 C49.2 | C79.1 45.8,65.36 47.13,65.36 47.42,65.07 47.9,65.07 | C75.2 44.2,65.57 C79.1 | 35.25,64.69 36.64,66.08 37.29,66.08 C93.1 41.53,70.32 41.53,69.64 C79.1 | C105.1 7.7,65.36 9.03,65.36 9.32,65.07 9.8,65.07 | C101.2 6.1,65.57 C105.1 | 92.4,64.69 93.88,66.17 C54.1 96.52,68.16 96.52,69.85 96.52,72.21 | 16.2,64.69 17.8,66.29 C106.1 22.86,70.7 22.86,69.25 C92.1 | C66.1 64.95,68.67 C63.1 | C66.1 63.25,65.57 C62.2 | C66.1 64.85,65.36 66.18,65.36 66.47,65.07 66.95,65.07 | C49.2 80.01,69.25 80.01,70.7 C67.1 74.83,66.17 73.35,64.69 | C66.1 60.96,69.25 60.96,70.7 C80.1 55.78,66.17 54.3,64.69 | C49.2 84,68.67 C50.1 | C79.1 45.9,68.67 C76.1 | C92.1 26.85,68.67 C89.1 | C92.1 25.15,65.57 C88.2 | C105.1 7.8,68.67 C102.1 | C105.1 5.1,67.97 | 5.1,67.97 3.81,69.25 C104.+ | 5.1,67.97 1.93,67.97 1.91,67.94 | C92.1 26.75,65.36 28.08,65.36 28.37,65.07 28.85,65.07
  Top 0.61: 93.25,79.53 96.52,76.26 96.52,69.85
  Top 0.762: C80.1 56.43,66.27 | 93.25,79.53 84.47,79.53 C52.+ | 6.68,17.33 8.15,18.8 R1.2
  Top 1.016: 1.91,57.78 1.91,57.15 2.19,57.44 6.7,57.44 FAN3.1 | 1.91,52.07 1.91,51.44 | 1.91,46.35 1.91,45.72 | 1.91,40.64 1.91,40.01 | F2.1 14.71,31.65 2.44,31.65 1.91,31.11 | 41.53,70.32 C78.+ | 60.96,70.7 C65.+ | 80.01,70.7 C52.+ | 22.86,70.7 C91.+ | 1.91,43.18 13.97,43.18 F3.1 | FAN2.1 1.91,46.99 | 1.91,53.98 FAN4.1 | FAN1.1 6.7,50.45 4.09,50.45 1.91,48.26
  Top 1.27: PWRIN.1 13.04,8.89 D1.A
  Top 1.778: PWRIN.1 6.68,11.73 6.68,17.33 1.91,22.1 1.91,31.11 1.91,40.01 1.91,43.18 1.91,45.72 1.91,46.99 1.91,48.26 1.91,51.44 1.91,53.98 1.91,57.15 1.91,67.94 1.91,72.4 C104.+ 3.82,74.31 6.35,76.83 6.35,78.25 8.14,80.04 17.26,80.04 22.23,75.07 C91.+ 22.86,75.71 27.19,80.04 36.31,80.04 41.28,75.07 C78.+ 42.54,75.07 46.24,78.77 55.36,78.77 59.06,75.07 C65.+ 60.96,75.71 65.29,80.04 74.41,80.04 79.38,75.07 C52.+
  Bottom 0.406: v33.78,32.13 19.27,32.13 17.14,30.01 F2.1 | PWRIN.1 6.22,5.59 6.22,3.43 8.43,1.22 36.45,1.22 v41.58,6.35
  Bottom 1.016: 1.91,52.07 1.91,50.8 | 1.91,46.35 1.91,45.72 | F2.1 14.71,31.65 2.01,31.65 1.91,31.75 | F3.1 13.97,43.18 1.91,43.18 | 1.91,46.99 FAN2.1
  Bottom 1.778: PWRIN.1 6.68,11.73 6.68,17.33 1.91,22.1 1.91,31.75 1.91,43.18 1.91,45.72 1.91,46.99 1.91,50.8 1.91,53.98 FAN4.1
A1_E1  (via drill 0.4)
  Top 0.203: v27.84,61.85 27.34,61.85 v26.92,61.43
  Top 0.305: IC10.34 28.1,63.13 v27.84,62.87
  Top 1.016: C94.1 27.67,77.2 X8.1
  Bottom 0.203: v27.84,62.87 v27.84,61.85
  Bottom 1.27: v26.92,61.43 27.84,62.35 v27.84,62.87 | v27.84,61.85 27.84,62.71 27.58,62.97 25.48,62.97 24.49,63.96 24.49,65.14 27.94,68.59 X8.1
  pour Bottom (isolate 0.203, no thermals): 29.08,79.12 29.08,67.56 27.3,65.79 26.04,65.79 25.15,64.9 25.15,64.14 25.65,63.63 28.19,63.63 28.57,63.25 28.57,61.59 27.69,60.71 26.67,60.71 23.62,63.75 23.62,65.41 26.8,68.58 26.8,79.12
  pour Top (isolate 0.203, no thermals): 29.21,63.37 27.05,63.37 26.29,62.61 26.29,61.21 26.67,60.83 27.56,60.83 28.45,61.72 28.45,62.74 28.57,62.87 29.21,62.87
A1_E2  (via drill 0.4)
  Top 0.203: v8.79,61.85 8.29,61.85 v7.87,61.43
  Top 0.305: IC11.34 9.05,63.13 v8.79,62.87
  Top 1.016: C107.1 8.62,77.2 X9.1
  Bottom 0.203: v8.79,62.87 v8.79,61.85
  Bottom 1.27: v7.87,61.43 8.79,62.35 v8.79,62.87 | v8.79,61.85 8.79,62.71 8.53,62.97 6.43,62.97 5.44,63.96 5.44,65.14 8.89,68.59 X9.1
  pour Bottom (isolate 0.203, no thermals): 10.03,79.12 10.03,67.56 8.26,65.79 6.99,65.79 6.1,64.9 6.1,64.14 6.6,63.63 9.14,63.63 9.53,63.25 9.53,61.59 8.64,60.71 7.62,60.71 4.57,63.75 4.57,65.41 7.75,68.58 7.75,79.12
  pour Top (isolate 0.203, no thermals): 10.16,63.37 8,63.37 7.24,62.61 7.24,61.21 7.62,60.83 8.51,60.83 9.4,61.72 9.4,62.74 9.53,62.87 10.16,62.87
A1_X  (via drill 0.4)
  Top 0.203: v84.99,61.85 84.49,61.85 v84.07,61.43
  Top 0.305: IC7.34 85.25,63.13 v84.99,62.87
  Top 1.016: C55.1 84.82,77.2 X4.1
  Bottom 0.203: v84.99,62.87 v84.99,61.85
  Bottom 1.27: v84.07,61.43 84.99,62.35 v84.99,62.87 | v84.99,61.85 84.99,62.71 84.73,62.97 82.63,62.97 81.64,63.96 81.64,65.14 85.09,68.59 X4.1
  pour Bottom (isolate 0.203, no thermals): 86.23,79.12 86.23,67.56 84.45,65.79 83.19,65.79 82.3,64.9 82.3,64.14 82.8,63.63 85.34,63.63 85.72,63.25 85.72,61.59 84.84,60.71 83.82,60.71 80.77,63.75 80.77,65.41 83.95,68.58 83.95,79.12
  pour Top (isolate 0.203, no thermals): 86.36,63.37 84.2,63.37 83.44,62.61 83.44,61.21 83.82,60.83 84.71,60.83 85.6,61.72 85.6,62.74 85.72,62.87 86.36,62.87
A1_Y  (via drill 0.4)
  Top 0.203: v65.94,61.85 65.44,61.85 v65.02,61.43
  Top 0.305: IC8.34 66.2,63.13 v65.94,62.87
  Top 1.016: C68.1 65.77,77.2 X5.1
  Bottom 0.203: v65.94,62.87 v65.94,61.85
  Bottom 1.27: v65.02,61.43 65.94,62.35 v65.94,62.87 | v65.94,61.85 65.94,62.71 65.68,62.97 63.58,62.97 62.59,63.96 62.59,65.14 66.04,68.59 X5.1
  pour Bottom (isolate 0.203, no thermals): 67.18,79.12 67.18,67.56 65.41,65.79 64.14,65.79 63.25,64.9 63.25,64.14 63.75,63.63 66.29,63.63 66.67,63.25 66.67,61.59 65.79,60.71 64.77,60.71 61.72,63.75 61.72,65.41 64.9,68.58 64.9,79.12
  pour Top (isolate 0.203, no thermals): 67.31,63.37 65.15,63.37 64.39,62.61 64.39,61.21 64.77,60.83 65.66,60.83 66.55,61.72 66.55,62.74 66.67,62.87 67.31,62.87
A1_Z  (via drill 0.4)
  Top 0.203: v46.89,61.85 46.39,61.85 v45.97,61.43
  Top 0.305: IC9.34 47.15,63.13 v46.89,62.87
  Top 1.016: X7.1 46.09,83.19 C81.1
  Bottom 0.203: v46.89,62.87 v46.89,61.85
  Bottom 1.27: v45.97,61.43 46.89,62.35 v46.89,62.87 | v46.89,61.85 46.89,62.71 46.63,62.97 44.53,62.97 43.54,63.96 43.54,65.14 44.8,66.41 44.8,81 X7.1
  pour Bottom (isolate 0.203, no thermals): 46.1,79.76 46.1,66.8 44.2,64.9 44.2,64.14 44.7,63.63 47.24,63.63 47.62,63.25 47.62,61.59 46.74,60.71 45.72,60.71 42.67,63.75 42.67,66.04 43.81,67.18 43.81,82.55 46.35,85.09 48.26,85.09 48.26,81.92
  pour Top (isolate 0.203, no thermals): 48.26,63.37 46.1,63.37 45.34,62.61 45.34,61.21 45.72,60.83 46.61,60.83 47.5,61.72 47.5,62.74 47.62,62.87 48.26,62.87
A2_E1  (via drill 0.4)
  Top 1.016: X8.2 30.75,77.2 C95.1
  Bottom 0.203: v27.84,64.39 27.09,64.39 v26.92,64.55
  Bottom 1.27: v25.91,64.55 26.07,64.39 | v27.84,64.39 27.84,65.14 30.48,67.78 X8.2
  pour Bottom (isolate 0.203, rank 2, no thermals): 31.62,79.12 31.62,68.07 28.7,65.15 28.7,64.14 28.19,63.63 25.65,63.63 25.15,64.14 25.15,64.9 26.04,65.79 27.3,65.79 29.34,67.82 29.34,79.12
  pour Top (isolate 0.203, no thermals): 29.21,63.88 25.78,63.88 25.27,64.39 25.27,64.77 25.65,65.15 27.94,65.15 28.7,64.39 29.21,64.39
A2_E2  (via drill 0.4)
  Top 1.016: X9.2 11.7,77.2 C108.1
  Bottom 0.203: v8.79,64.39 8.04,64.39 v7.87,64.55
  Bottom 1.27: v6.86,64.55 7.02,64.39 | v8.79,64.39 8.79,65.14 11.43,67.78 X9.2
  pour Bottom (isolate 0.203, rank 2, no thermals): 12.57,79.12 12.57,68.07 9.65,65.15 9.65,64.14 9.14,63.63 6.6,63.63 6.1,64.14 6.1,64.9 6.99,65.79 8.26,65.79 10.29,67.82 10.29,79.12
  pour Top (isolate 0.203, no thermals): 10.16,63.88 6.73,63.88 6.22,64.39 6.22,64.77 6.6,65.15 8.89,65.15 9.65,64.39 10.16,64.39
A2_X  (via drill 0.4)
  Top 0.203: IC7.32
  Top 0.305: 85.47,64.19 85.52,64.14 IC7.32 | IC7.32 85.25,64.13 v84.99,64.39
  Top 0.406: v84.99,64.39 85.27,64.39 85.47,64.19
  Top 1.016: X4.2 87.9,77.2 C56.1
  Bottom 0.203: v84.99,64.39 84.23,64.39 v84.07,64.55
  Bottom 1.27: v83.06,64.55 83.22,64.39 | v84.99,64.39 84.99,65.14 87.63,67.78 X4.2
  pour Bottom (isolate 0.203, rank 2, no thermals): 88.77,79.12 88.77,68.07 85.85,65.15 85.85,64.14 85.34,63.63 82.8,63.63 82.3,64.14 82.3,64.9 83.19,65.79 84.45,65.79 86.49,67.82 86.49,79.12
  pour Top (isolate 0.203, no thermals): 86.36,63.88 82.93,63.88 82.42,64.39 82.42,64.77 82.8,65.15 85.09,65.15 85.85,64.39 86.36,64.39
A2_Y  (via drill 0.4)
  Top 1.016: X5.2 68.85,77.2 C69.1
  Bottom 0.203: v65.94,64.39 65.19,64.39 v65.02,64.55
  Bottom 1.27: v64.01,64.55 64.17,64.39 | v65.94,64.39 65.94,65.14 68.58,67.78 X5.2
  pour Bottom (isolate 0.203, rank 2, no thermals): 69.72,79.12 69.72,68.07 66.8,65.15 66.8,64.14 66.29,63.63 63.75,63.63 63.25,64.14 63.25,64.9 64.14,65.79 65.41,65.79 67.44,67.82 67.44,79.12
  pour Top (isolate 0.203, no thermals): 67.31,63.88 63.88,63.88 63.37,64.39 63.37,64.77 63.75,65.15 66.04,65.15 66.8,64.39 67.31,64.39
A2_Z  (via drill 0.4)
  Top 1.016: C82.1 49.8,75.93 X6.2
  Bottom 1.27: v44.96,64.55 45.12,64.39
  other vias: 46.89,64.39 45.97,64.55
  pour Bottom (isolate 0.203, rank 2, no thermals): 50.67,77.85 50.67,68.07 47.75,65.15 47.75,64.14 47.24,63.63 44.7,63.63 44.2,64.14 44.2,64.9 48.39,69.09 48.39,77.85
  pour Top (isolate 0.203, no thermals): 48.26,63.88 44.83,63.88 44.32,64.39 44.32,64.77 44.7,65.15 46.99,65.15 47.75,64.39 48.26,64.39
ADVREF
  Top 0.254: R40.2 75.82,27.39 R39.2 73.92,30.64 L4.1 73.03,31.45 73.96,32.38 76.25,32.38 R41.2
  Top 0.305: IC3.1 70.75,30.83 C24.1 71.5,30.82 72.85,30.82 L4.1
AMID_Z
  Bottom 1.778: X6.1 46.99,78.39 49.53,80.93 X7.2
B1_E1  (via drill 0.4)
  Top 0.203: v35.66,61.85 36.16,61.85 v36.58,61.43
  Top 0.305: IC10.13 35.4,63.13 v35.66,62.87
  Top 1.016: C96.1 32.75,77.2 X8.3
  Bottom 0.203: v35.66,62.87 v35.66,61.85
  Bottom 1.27: v36.58,61.43 35.66,62.35 v35.66,62.87 34.92,63.6 34.92,65.87 33.02,67.78 X8.3
  pour Bottom (isolate 0.203, no thermals): 34.16,79.12 34.16,67.56 35.56,66.17 35.56,64.14 37.47,62.23 37.47,61.34 36.83,60.71 35.56,60.71 34.29,61.98 34.29,65.66 31.88,68.07 31.88,79.12
  pour Top (isolate 0.203, no thermals): 34.29,63.37 34.29,62.87 35.05,62.87 35.18,62.74 35.18,61.21 35.56,60.83 36.96,60.83 37.47,61.34 37.47,62.1 36.2,63.37
B1_E2  (via drill 0.4)
  Top 0.203: v16.61,61.85 17.11,61.85 v17.53,61.43
  Top 0.305: IC11.13 16.35,63.13 v16.61,62.87
  Top 1.016: C109.1 13.7,77.2 X9.3
  Bottom 0.203: v16.61,62.87 v16.61,61.85
  Bottom 1.27: v17.53,61.43 16.61,62.35 v16.61,62.87 15.88,63.6 15.88,65.87 13.97,67.78 X9.3
  pour Bottom (isolate 0.203, no thermals): 15.11,79.12 15.11,67.56 16.51,66.17 16.51,64.14 18.41,62.23 18.41,61.34 17.78,60.71 16.51,60.71 15.24,61.98 15.24,65.66 12.83,68.07 12.83,79.12
  pour Top (isolate 0.203, no thermals): 15.24,63.37 15.24,62.87 16,62.87 16.13,62.74 16.13,61.21 16.51,60.83 17.91,60.83 18.41,61.34 18.41,62.1 17.14,63.37
B1_X  (via drill 0.4)
  Top 0.203: v92.81,61.85 93.31,61.85 v93.73,61.43
  Top 0.305: IC7.13 92.55,63.13 v92.81,62.87
  Top 1.016: C57.1 89.9,77.2 X4.3
  Bottom 0.203: v92.81,62.87 v92.81,61.85
  Bottom 1.27: v93.73,61.43 92.81,62.35 v92.81,62.87 92.08,63.6 92.08,65.87 90.17,67.78 X4.3
  pour Bottom (isolate 0.203, no thermals): 91.31,79.12 91.31,67.56 92.71,66.17 92.71,64.14 94.61,62.23 94.61,61.34 93.98,60.71 92.71,60.71 91.44,61.98 91.44,65.66 89.03,68.07 89.03,79.12
  pour Top (isolate 0.203, no thermals): 91.44,63.37 91.44,62.87 92.2,62.87 92.33,62.74 92.33,61.21 92.71,60.83 94.11,60.83 94.61,61.34 94.61,62.1 93.34,63.37
B1_Y  (via drill 0.4)
  Top 0.203: v73.76,61.85 74.26,61.85 v74.68,61.43
  Top 0.305: IC8.13 73.5,63.13 v73.76,62.87
  Top 1.016: C70.1 70.85,77.2 X5.3
  Bottom 0.203: v73.76,62.87 v73.76,61.85
  Bottom 1.27: v74.68,61.43 73.76,62.35 v73.76,62.87 73.03,63.6 73.03,65.87 71.12,67.78 X5.3
  pour Bottom (isolate 0.203, no thermals): 72.26,79.12 72.26,67.56 73.66,66.17 73.66,64.14 75.56,62.23 75.56,61.34 74.93,60.71 73.66,60.71 72.39,61.98 72.39,65.66 69.98,68.07 69.98,79.12
  pour Top (isolate 0.203, no thermals): 72.39,63.37 72.39,62.87 73.15,62.87 73.28,62.74 73.28,61.21 73.66,60.83 75.06,60.83 75.56,61.34 75.56,62.1 74.3,63.37
B1_Z  (via drill 0.4)
  Top 0.203: v54.71,61.85 55.21,61.85 v55.63,61.43
  Top 0.305: IC9.13 54.45,63.13 v54.71,62.87
  Top 1.016: C83.1 51.8,75.93 X6.3
  Bottom 0.203: v54.71,62.87 v54.71,61.85
  Bottom 1.27: v55.63,61.43 54.71,62.35 v54.71,62.87 53.98,63.6 53.98,65.87 52.07,67.78 X6.3
  pour Bottom (isolate 0.203, no thermals): 53.21,77.85 53.21,68.83 54.61,67.44 54.61,64.14 56.52,62.23 56.52,61.34 55.88,60.71 54.61,60.71 53.34,61.98 53.34,65.66 50.93,68.07 50.93,77.85
  pour Top (isolate 0.203, no thermals): 53.34,63.37 53.34,62.87 54.1,62.87 54.23,62.74 54.23,61.21 54.61,60.83 56.01,60.83 56.52,61.34 56.52,62.1 55.24,63.37
B2_E1  (via drill 0.4)
  Top 0.305: IC10.15 35.93,64.13 v36.35,64.55
  Top 1.016: X8.4 35.83,77.2 C97.1
  Bottom 1.27: v38.35,64.52 37.37,64.52 v37.34,64.55 v36.35,64.55 36.35,66.46 35.56,67.25 X8.4
  pour Bottom (isolate 0.203, rank 2, no thermals): 34.42,79.12 34.42,67.31 35.56,66.17 35.56,64.14 36.07,63.63 38.61,63.63 39.12,64.14 39.12,64.77 36.7,67.18 36.7,79.12
  pour Top (isolate 0.203, no thermals): 34.29,63.88 34.29,64.39 35.43,64.39 36.2,65.15 38.61,65.15 38.86,64.9 38.86,64.26 38.48,63.88
B2_E2  (via drill 0.4)
  Top 0.305: IC11.15 16.88,64.13 v17.3,64.55
  Top 1.016: X9.4 16.78,77.2 C110.1
  Bottom 1.27: v19.3,64.52 18.32,64.52 v18.29,64.55 v17.3,64.55 17.3,66.46 16.51,67.25 X9.4
  pour Bottom (isolate 0.203, rank 2, no thermals): 15.37,79.12 15.37,67.31 16.51,66.17 16.51,64.14 17.02,63.63 19.68,63.63 20.07,64.01 20.07,64.77 17.65,67.18 17.65,79.12
  pour Top (isolate 0.203, no thermals): 15.24,63.88 15.24,64.39 16.38,64.39 17.14,65.15 19.56,65.15 19.81,64.9 19.81,64.26 19.43,63.88
B2_X  (via drill 0.4)
  Top 0.305: IC7.15 93.08,64.13 v93.5,64.55
  Top 1.016: X4.4 92.98,77.2 C58.1
  Bottom 1.27: v95.5,64.52 94.52,64.52 v94.49,64.55 v93.5,64.55 93.5,66.46 92.71,67.25 X4.4
  pour Bottom (isolate 0.203, rank 2, no thermals): 91.57,79.12 91.57,67.31 92.71,66.17 92.71,64.14 93.22,63.63 95.76,63.63 96.27,64.14 96.27,64.77 93.85,67.18 93.85,79.12
  pour Top (isolate 0.203, no thermals): 91.44,63.88 91.44,64.39 92.58,64.39 93.34,65.15 95.76,65.15 96.01,64.9 96.01,64.26 95.63,63.88
B2_Y  (via drill 0.4)
  Top 0.305: IC8.15 74.03,64.13 v74.45,64.55
  Top 1.016: X5.4 73.93,77.2 C71.1
  Bottom 1.27: v76.45,64.52 75.47,64.52 v75.44,64.55 v74.45,64.55 74.45,66.46 73.66,67.25 X5.4
  pour Bottom (isolate 0.203, rank 2, no thermals): 72.52,79.12 72.52,67.31 73.66,66.17 73.66,64.14 74.17,63.63 76.71,63.63 77.22,64.14 77.22,64.77 74.8,67.18 74.8,79.12
  pour Top (isolate 0.203, no thermals): 72.39,63.88 72.39,64.39 73.53,64.39 74.3,65.15 76.71,65.15 76.96,64.9 76.96,64.26 76.58,63.88
B2_Z  (via drill 0.4)
  Top 0.305: IC9.15 54.98,64.13 v55.4,64.55
  Top 1.016: X7.4 55.51,83.19 C84.1
  Bottom 1.27: v57.4,64.52 56.42,64.52 v56.39,64.55 | v56.39,64.55 v55.4,64.55 | v56.39,64.55 56.8,64.96 56.8,81 X7.4
  pour Bottom (isolate 0.203, rank 2, no thermals): 55.5,79.76 55.5,63.63 57.66,63.63 58.17,64.14 58.17,64.77 57.78,65.15 57.78,82.55 55.24,85.09 53.34,85.09 53.34,81.92
  pour Top (isolate 0.203, no thermals): 53.34,63.88 53.34,64.39 54.48,64.39 55.24,65.15 57.66,65.15 57.91,64.9 57.91,64.26 57.53,63.88
BED
  Top 0.203: IC3.86 59.96,27.22 57.78,25.04 56.05,25.04 55.75,24.74 52,24.74 51.09,25.65 33.27,25.65 25.11,17.49 16.56,17.49 R50.1
BED_L
  Top 0.406: EXT2_L.A R49.1
BED_OUT
  Top 0.203: R50.2 13.76,17.14 X3.1
BMID_Z
  Bottom 1.778: X7.3 52.07,80.95 54.61,78.41 X6.4
BOOT
  Top 0.305: C7.1 29.17,12.17 28.5,11.5 IC1.11
BRA_E1
  Top 0.356: 27.88,63.63 IC10.33
  Top 0.406: R63.1 26.95,63.63 27.88,63.63
BRA_E2
  Top 0.356: 8.83,63.63 IC11.33
  Top 0.406: R67.1 7.9,63.63 8.83,63.63
BRA_X
  Top 0.356: 85.03,63.63 IC7.33
  Top 0.406: R51.1 84.1,63.63 85.03,63.63
BRA_Y
  Top 0.356: 65.98,63.63 IC8.33
  Top 0.406: R55.1 65.05,63.63 65.98,63.63
BRA_Z
  Top 0.356: 46.93,63.63 IC9.33
  Top 0.406: R59.1 46,63.63 46.93,63.63
BRB_E1
  Top 0.356: 35.98,63.62 IC10.14
  Top 0.406: R64.1 36.55,63.63 36.15,63.63 36.14,63.62 35.98,63.62
BRB_E2
  Top 0.356: 16.93,63.62 IC11.14
  Top 0.406: R68.1 17.5,63.63 17.1,63.63 17.09,63.62 16.93,63.62
BRB_X
  Top 0.356: 93.13,63.62 IC7.14
  Top 0.406: R52.1 93.7,63.63 93.3,63.63 93.29,63.62 93.13,63.62
BRB_Y
  Top 0.356: 74.08,63.62 IC8.14
  Top 0.406: R56.1 74.65,63.63 74.25,63.63 74.24,63.62 74.08,63.62
BRB_Z
  Top 0.356: 55.03,63.62 IC9.14
  Top 0.406: R60.1 55.6,63.63 55.2,63.63 55.19,63.62 55.03,63.62
CLK
  Top 0.203: J1.P5 53.8,1.43 53.8,1.42 53.65,1.27 49.53,1.27 47.89,1.27 47.72,1.44 47.72,5.41 R30.2
CMD
  Top 0.203: J1.P3 57.19,2.62 57.19,2.63 57.7,3.13 60.09,3.13 61.29,4.33 61.29,5.17 61.35,5.23 61.35,6.76 R29.2 R35.1
CPI_E1
  Top 0.203: C90.1 29.5,67.06 IC10.28
CPI_E2
  Top 0.203: C103.1 10.45,67.06 IC11.28
CPI_X
  Top 0.203: C51.1 86.65,67.06 IC7.28
CPI_Y
  Top 0.203: C64.1 67.6,67.06 IC8.28
CPI_Z
  Top 0.203: C77.1 48.55,67.06 IC9.28
CPO_E1
  Top 0.203: IC10.27 30,68.26 C90.2
CPO_E2
  Top 0.203: IC11.27 10.95,68.26 C103.2
CPO_X
  Top 0.203: IC7.27 87.15,68.26 C51.2
CPO_Y
  Top 0.203: IC8.27 68.1,68.26 C64.2
CPO_Z
  Top 0.203: IC9.27 49.05,68.26 C77.2
DAT0
  Top 0.203: R28.2 49.83,2.78 51.45,2.78 51.6,2.63 51.6,2.62 J1.P7
DAT1
  Top 0.203: R32.2 48.55,2.02 J1.P8
DAT2
  Top 0.203: J1.P1 60.67,2.02 R33.2
DAT3
  Top 0.203: J1.P2 58.29,2.62 58.29,2.63 58.44,2.78 60.24,2.78 61.64,4.18 61.64,5.02 R31.2
DET
  Top 0.203: J1.P9 60.42,4.7 59.79,5.33 59.79,10.11 R34.1 59.35,10.6 R27.2
E1_DIR
  Top 0.203: IC10.7 32.5,59.6 34.54,57.57 36.02,57.57 50.76,42.83 IC3.51
E1_EN
  Top 0.203: IC3.55 51.75,40.83 35.73,56.85 31.03,56.85 30,57.88 IC10.2
E1_FUSED
  Top 1.016: F2.2 6.35,29.21 J2.2
  Bottom 1.016: J2.2 6.35,29.21 F2.2
E1_STEP
  Top 0.203: IC10.6 32,59.6 34.39,57.21 35.88,57.21 51.76,41.33 IC3.54
E2_DIR
  Top 0.203: IC11.7 13.45,59.6 16.56,56.49 17.16,56.49 17.26,56.59 29.8,56.59 29.89,56.5 35.58,56.5 48.11,43.97 49.11,42.96 49.11,37.83 49.61,37.34 49.69,37.34 49.69,37.33 IC3.62
E2_EN
  Top 0.203: IC11.2 10.95,58.73 13.08,56.61 14.08,56.61 14.91,55.78 17.46,55.78 17.55,55.88 29.5,55.88 29.59,55.79 35.29,55.79 47.4,43.68 47.4,43.67 48.4,42.67 48.4,37.53 49.31,36.62 49.4,36.62 50.69,35.33 IC3.66
E2_FUSED
  Top 1.016: J2.4 6.99,40.01 F3.2
  Bottom 1.016: J2.4 6.99,40.01 F3.2
E2_STEP
  Top 0.203: IC11.6 12.95,59.6 16.41,56.14 17.31,56.14 17.41,56.23 29.65,56.23 29.74,56.14 35.43,56.14 47.75,43.83 47.75,43.82 48.76,42.81 48.76,37.68 49.46,36.98 49.54,36.98 50.69,35.83 IC3.65
EDR_CONN
  Top 0.203: R25.2 84.66,32.88 84.66,34.45 85.28,35.06 88.59,35.06 ESP8266.12
ENN  (via drill 0.4)
  Top 0.203: IC8.22 70.6,66.61 71.23,67.24 72.55,67.24 72.78,67.01 74.29,67.01 75.86,68.58 75.86,68.62 76.24,69.01 76.28,69.01 76.64,69.36 v76.64,69.41 | IC9.22 51.55,66.61 52.18,67.24 53.5,67.24 53.73,67.01 55.36,67.01 55.62,67.28 56.31,67.28 59.45,70.41 v59.45,70.83 | IC11.22 13.45,66.61 14.08,67.24 15.4,67.24 15.63,67.01 17.14,67.01 18.71,68.58 18.71,68.62 v19.49,69.4 v19.49,69.41 | IC7.22 89.65,66.61 90.28,67.24 91.6,67.24 91.83,67.01 93.34,67.01 94.91,68.58 94.91,68.63 v95.69,69.41 | v55.75,58.88 58.39,58.88 v59.1,58.17 59.1,52.39 v55.24,48.54 | v77.37,59.48 76.83,58.95 v76.83,58.17 | IC10.22 32.62,66.4 32.62,66.72 33.13,67.24 34.45,67.24 34.68,67.01 36.31,67.01 36.57,67.28 36.83,67.28 37.76,68.2 37.76,68.62 v38.54,69.4 v38.54,69.41 | IC3.71 51.66,32.83 v51.45,32.62 | v46.38,42.41 46.38,37.24 v47.9,35.71
  Bottom 0.203: v95.69,69.41 97.91,67.18 97.91,61.41 94.67,58.17 v76.83,58.17 v59.1,58.17 | v59.45,70.83 59.46,70.82 59.46,61.56 57.94,60.04 57.33,60.04 56.18,58.88 v55.75,58.88 44.56,58.88 | v76.64,69.41 78.86,67.18 78.86,60.98 v77.37,59.48 | v38.54,69.41 40.76,67.18 40.76,62.68 44.56,58.88 | v19.49,69.41 21.71,67.18 21.71,62.68 25.51,58.88 44.56,58.88 | v47.9,35.71 48.09,35.53 48.09,34.78 50.24,32.62 v51.45,32.62 | v46.38,42.41 46.38,44.91 50,48.54 v55.24,48.54
ERASE
  Top 0.203: IC3.87 60.46,24.52 ERASE.2
ESP_CS
  Top 0.305: R26.2 83.91,34.27 85.84,36.2 ESP8266.10